# EAGLE board sch_smd_1206_component_draft_2 (EAGLE 8.4.3)
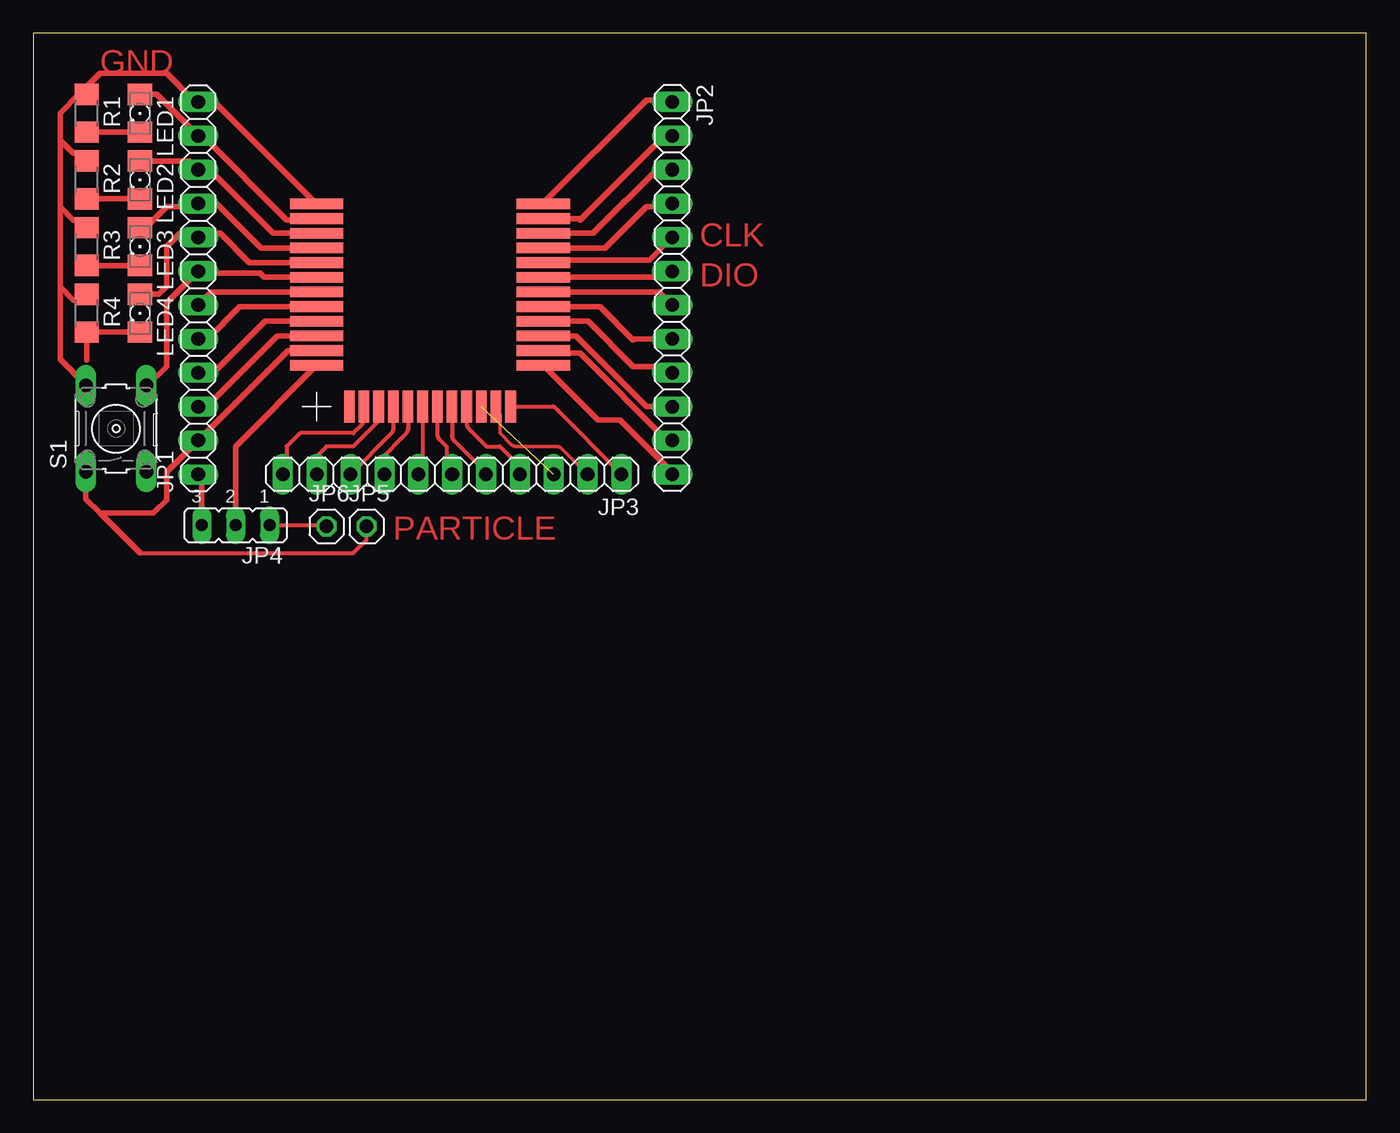
[diagram p0: board, top side]

Size 100 x 80 mm. Coordinates in mm from the lower left corner, seen from the top.
Outline: 0,0 100,0 100,80 0,80 0,0
Copper layers (1*16): Top 0.035mm / dielectric 1.5mm / Bottom 0.035mm
Design rules "default": minimum track width 6mil, minimum drill 0.35mm, track to track 6mil, track to pad 6mil, pad to pad 6mil, via to via 6mil, smd to smd 6mil, copper to edge 40mil, drill to drill 6mil, minimum pad ring 10mil, minimum via ring 8mil, stop-mask expansion 4mil, vias tented up to drill 0mil, thermal gap 10mil

## Footprints (pad centres in the part's own frame; a part is rotated, then mirrored left to right if it is on the bottom)
1X12 = drill 1.016 long: 1 -13.97,0; 2 -11.43,0; 3 -8.89,0; 4 -6.35,0; 5 -3.81,0; 6 -1.27,0; 7 1.27,0; 8 3.81,0; 9 6.35,0; 10 8.89,0; 11 11.43,0; 12 13.97,0
1X11 = drill 1.016 long: 1 -12.7,0; 2 -10.16,0; 3 -7.62,0; 4 -5.08,0; 5 -2.54,0; 6 0,0; 7 2.54,0; 8 5.08,0; 9 7.62,0; 10 10.16,0; 11 12.7,0
JP2 = drill 0.914 long: 1 -2.54,0; 2 0,0; 3 2.54,0
1X01 = drill 1.016 octagon: 1 0,0
LED_1206 = smd 1.6 x 1.803: A -1.422,0; C 1.422,0
R1206 = smd 1.6 x 1.803: 1 -1.422,0; 2 1.422,0
B3F-10XX = drill 1.016 long: 1 -3.251,2.261; 2 3.251,2.261; 3 -3.251,-2.261; 4 3.251,-2.261
SMD_PAD_VERSION = smd 4 x 0.8: P$01 0,15.2; P$02 0,14.1; P$03 0,13; P$04 0,11.9; P$05 0,10.8; P$06 0,9.7; P$07 0,8.6; P$08 0,7.5; P$09 0,6.4; P$10 0,5.3; P$11 0,4.2; P$12 0,3.1; P$25 17,3.1; P$26 17,4.2; P$27 17,5.3; P$28 17,6.4; P$29 17,7.5; P$30 17,8.6; P$31 17,9.7; P$32 17,10.8; P$33 17,11.9; P$34 17,13; P$35 17,14.1; P$36 17,15.2 | smd 0.8 x 2.4: P$13 2.45,0; P$14 3.55,0; P$15 4.65,0; P$16 5.75,0; P$17 6.85,0; P$18 7.95,0; P$19 9.05,0; P$20 10.15,0; P$21 11.25,0; P$22 12.35,0; P$23 13.45,0; P$24 14.55,0

## Placement (x,y rotation side)
JP1  [1X12]  12.37,60.88 90 top
JP2  [1X12]  47.93,60.88 270 top
JP3  [1X11]  31.42,46.91 180 top
JP4  [JP2]  15.18,43.1 180 top
JP5  [1X01]  25,43 0 top
JP6  [1X01]  22,43 0 top
LED1  RED  [LED_1206]  8,74 270 top
LED2  GREEN  [LED_1206]  8,69 270 top
LED3  W  [LED_1206]  8,64 270 top
LED4  Y  [LED_1206]  8,59 270 top
R1  1000  [R1206]  4,74 270 top
R2  1k  [R1206]  4,69 270 top
R3  1k  [R1206]  4,64 270 top
R4  1k  [R1206]  4,59 270 top
S1  [B3F-10XX]  6.21,50.34 90 top
U$1  HZX_MODULE  [SMD_PAD_VERSION]  21.26,51.99 0 top

## Library data of the parts
JP1 = pinhead; SPICEPREFIX: X
JP2 JP3 JP5 JP6 = pinhead
JP4 = jumper
LED1-LED4 = eagle-ltspice; SPICEMODEL: NONE; SPICEPREFIX: D; SPICETYPE: diode
R1-R4 = eagle-ltspice; SPICEMODEL: NONE; SPICEPREFIX: R
S1 = switch-omron; MPN: B3F-1000; OC_FARNELL: 176432; OC_NEWARK: 36M3542
U$1 = HZX_MODULE; AUTHOR: Agam

## Nets
N$1: JP4.2 U$1.P$12
N$3: JP1.3 U$1.P$10
N$4: JP1.4 U$1.P$09
N$5: JP1.5 U$1.P$08
N$6: JP1.6 U$1.P$07
N$7: JP1.7 S1.4 U$1.P$06
N$8: JP1.8 LED4.A U$1.P$05
N$9: JP1.9 LED3.A U$1.P$04
N$10: JP1.10 LED2.A U$1.P$03
N$11: JP1.11 LED1.A U$1.P$02
N$12: JP1.1 JP4.3
N$13: JP2.1 U$1.P$36
N$14: JP2.2 U$1.P$35
N$15: JP2.3 U$1.P$34
N$16: JP2.4 U$1.P$33
N$17: JP2.5 U$1.P$32
N$18: JP2.6 U$1.P$31
N$19: JP2.7 U$1.P$30
N$20: JP2.8 U$1.P$29
N$21: JP2.9 U$1.P$28
N$22: JP2.10 U$1.P$27
N$23: JP2.11 U$1.P$26
N$24: JP2.12 U$1.P$25
N$25: JP3.1 U$1.P$24
N$26: JP3.2 U$1.P$23
N$27: JP3.3 U$1.P$22
N$28: JP3.4 U$1.P$21
N$29: JP3.5 U$1.P$20
N$30: JP3.6 U$1.P$19
N$31: JP3.7 U$1.P$18
N$32: JP3.8 U$1.P$17
N$33: JP3.9 U$1.P$16
N$34: JP3.10 U$1.P$15
N$35: JP3.11 U$1.P$14
N$37: JP1.2 JP5.1 S1.1 U$1.P$11
N$38: JP4.1 JP6.1
N$39: LED1.C R1.2
N$40: LED2.C R2.2
N$41: LED3.C R3.2
N$42: LED4.C R4.2
N$44: JP1.12 R1.1 R2.1 R3.1 R4.1 S1.2 U$1.P$01

## Tracks (layer width: path | path; a pad name or v marks a point on that pad's centre or on a via)
N$1
  Top 0.406: U$1.P$12 15.18,49.01 JP4.2
N$3
  Top 0.406: U$1.P$10 18.29,57.29 13,52 JP1.3
N$4
  Top 0.406: U$1.P$09 17.39,58.39 13.53,54.53 JP1.4
N$5
  Top 0.406: U$1.P$08 15.49,59.49 13,57 12.44,57 JP1.5
N$6
  Top 0.406: U$1.P$07 13.35,60.59 JP1.6
N$7
  Top 0.406: U$1.P$06 17.31,61.69 17,62 12.52,62 JP1.7 | 11.81,61.59 JP1.7 | JP1.7 10,59.78 10,55 8.59,53.59 S1.4
N$8
  Top 0.406: U$1.P$05 16.21,62.79 14,65 12.68,65 | JP1.8 12.68,65 | LED4.A 9.42,60.42 10,61 10,64 11,65 12.68,65
N$9
  Top 0.406: U$1.P$04 17.11,63.89 13.77,67.23 JP1.9 12.14,67 10,67 8.42,65.42 LED3.A
N$10
  Top 0.406: U$1.P$03 18,65 13.23,69.77 JP1.10 11.72,70.42 LED2.A
N$11
  Top 0.406: U$1.P$02 21.17,66 19,66 12.69,72.31 JP1.11 9.26,75.42 LED1.A
N$12
  Top 0.406: JP1.1 12.64,46.64 JP4.3
N$13
  Top 0.406: U$1.P$36 38.26,67.26 46,75 47.78,75 JP2.1
N$14
  Top 0.406: U$1.P$35 40.91,66.09 41,66 47,72 47.62,72 JP2.2
N$15
  Top 0.406: U$1.P$34 41.99,64.99 47,70 47.7,70 JP2.3
N$16
  Top 0.406: U$1.P$33 42.89,63.89 46,67 47.7,67 JP2.4
N$17
  Top 0.406: U$1.P$32 38.79,62.79 39,63 46.24,63 JP2.5
N$18
  Top 0.406: U$1.P$31 47.47,61.69 JP2.6
N$19
  Top 0.406: 47.54,60 JP2.7 46.95,60.59 U$1.P$30
N$20
  Top 0.406: U$1.P$29 42.51,59.49 45,57 45.07,57.07 JP2.8
N$21
  Top 0.406: U$1.P$28 41.61,58.39 45,55 47.46,55 JP2.9 48,54.46 48,54
N$22
  Top 0.406: U$1.P$27 40.71,57.29 46.01,51.99 JP2.10
N$23
  Top 0.406: U$1.P$26 38.45,56 41,56 47.55,49.45 JP2.11
N$24
  Top 0.406: U$1.P$25 42.35,51 44,51 47.93,47.07 JP2.12
N$25
  Top 0.305: U$1.P$24 38.98,51.99 arc45 39,52 arc-45 39.05,51.98 JP3.1
N$26
  Top 0.254: U$1.P$23 34.81,51.89 arc-45 35,51.44 35,50 35.81,49.19 arc45 36.26,49 39.23,49 arc-45 39.68,48.81 JP3.2
N$27  (1 unrouted)
N$28
  Top 0.305: U$1.P$21 32.51,50.75 arc45 32.7,50.3 34,49 35,49 36.31,47.69 arc-45 36.5,47.24 JP3.4
N$29
  Top 0.305: U$1.P$20 31.41,49.85 arc45 31.6,49.4 34,47 arc-45 JP3.5
N$30
  Top 0.305: U$1.P$19 30.31,49.95 arc45 30.5,49.5 31,49 31,47.59 arc45 31.19,47.14 JP3.6
N$31
  Top 0.305: U$1.P$18 29.21,47.5 arc-45 29.02,47.05 JP3.7
N$32
  Top 0.305: U$1.P$17 28.11,50.37 arc-45 27.92,49.92 26,48 26,47.51 arc45 26.19,47.06 JP3.8
N$33
  Top 0.305: U$1.P$16 27.01,50.38 arc-45 26.82,49.93 JP3.9
N$34
  Top 0.305: U$1.P$15 25.91,51.17 arc-45 25.72,50.72 24,49 22,49 21,48 21,47.43 arc45 21.19,46.98 JP3.10
N$35
  Top 0.305: U$1.P$14 24.81,51.07 arc-45 24.62,50.62 24,50 20,50 19,49 19,47.45 arc-45 18.81,47 JP3.11
N$37
  Top 0.305: 8,41 24,41 25,42 JP5.1
  Top 0.406: U$1.P$11 19.11,56.19 JP1.2 10,47.08 10,45 9,44 5,44 | S1.1 3.95,45.05 5,44 | 5,44 8,41
N$38
  Top 0.305: JP4.1 21.9,43.1 JP6.1
N$39
  Top 0.406: R1.2 LED1.C
N$40
  Top 0.406: R2.2 LED2.C
N$41
  Top 0.406: R3.2 LED3.C
N$42
  Top 0.406: LED4.C R4.2 4,55.47
N$44
  Top 0.406: U$1.P$01 13.6,74.85 JP1.12 | JP1.12 12.22,75 | JP1.12 12.15,74.85 10,77 5,77 4,76 R1.1 3.42,75.42 2,74 2,72 | S1.2 2,55.54 2,61 | 2,72 3,71 3.42,71 R2.1 | 2,67 2,72 | 2,67 3,66 3.42,66 R3.1 | 2,61 2,67 | 2,61 3,60 3.58,60 R4.1

## Text on the board
Top: GND | CLK | DIO | PARTICLE